# EAGLE board MainBoard_Simple (EAGLE 7.7.0)

Size 72.39 x 53.34 mm. Coordinates in mm from the lower left corner, seen from the top.
Outline: 0,53.34 0,0 72.39,0 72.39,22.86 62.1,22.86 62.1,53.34 0,53.34
Copper layers (1*16): Top 0.035mm / dielectric 1.5mm / Bottom 0.035mm
Design rules "default": minimum track width 10mil, minimum drill 24mil, track to track 8mil, track to pad 8mil, pad to pad 8mil, via to via 8mil, smd to smd 8mil, copper to edge 40mil, drill to drill 8mil, minimum pad ring 10mil, minimum via ring 8mil, stop-mask expansion 4mil, vias tented up to drill 0mil, thermal gap 10mil
Net classes: 1 med: width 0.254 mm, clearance 1.27 mm; 2 hv: width 0.254 mm, clearance 3.81 mm

## Footprints (pad centres in the part's own frame; a part is rotated, then mirrored left to right if it is on the bottom)
C1206 = smd 1.6 x 1.8: 1 -1.4,0; 2 1.4,0
C0603 = smd 1.1 x 1: 1 -0.85,0; 2 0.85,0
TAP5-60 = drill 0.813: + -2.54,0 | drill 0.813 octagon: - 2.54,0
SOD-123 = smd 0.9 x 0.95: A 1.575,0; C -1.575,0
DIODE-1N4001 = drill 1 pad 1.981: A -5.08,0; C 5.08,0
P1-13 = drill 1.321 pad 2.159 octagon: TP 0,0
UNO_R3_SHIELD_NOLABELS = drill 1.016 pad 1.88: 3.3V 50.8,26.67; 5V 50.8,29.21; A0 50.8,41.91; A1 50.8,44.45; A2 50.8,46.99; A3 50.8,49.53; A4 50.8,52.07; A5 50.8,54.61; AREF 2.54,15.24; D2 2.54,49.53; D3 2.54,46.99; D4 2.54,44.45; D5 2.54,41.91; D6 2.54,39.37; D7 2.54,36.83; D8 2.54,33.02; D9 2.54,30.48; D10 2.54,27.94; D11 2.54,25.4; D12 2.54,22.86; D13 2.54,20.32; GND@0 50.8,31.75; GND@1 50.8,34.29; GND@2 2.54,17.78; IOREF 50.8,21.59; NC 50.8,19.05; RES 50.8,24.13; RX 2.54,54.61; SCL 2.54,10.16; SDA 2.54,12.7; TX 2.54,52.07; VIN 50.8,36.83
SJ_2S-NO = smd 0.635 x 1.27: 1 -0.45,0; 2 0.45,0
1X04 = drill 1.016 long: 1 -3.81,0; 2 -1.27,0; 3 1.27,0; 4 3.81,0
SO-08 = smd 0.6 x 2.2: 1 -1.905,-2.6; 2 -0.635,-2.6; 3 0.635,-2.6; 4 1.905,-2.6; 5 1.905,2.6; 6 0.635,2.6; 7 -0.635,2.6; 8 -1.905,2.6
SOT23-3 = smd 0.8 x 0.9: 1 -0.95,-1; 2 0.95,-1; 3 0,1.1
R0603 = smd 1 x 1.1: 1 -0.85,0; 2 0.85,0
1206 = smd 1.6 x 1.8: 1 -1.4,0; 2 1.4,0
AXIAL-0.4 = drill 0.9 pad 1.88: P$1 -5.08,0; P$2 5.08,0
SOT23-6 = smd 0.55 x 1.2: 1 0.95,1.3; 2 0,1.3; 3 -0.95,1.3; 4 -0.95,-1.3; 5 0,-1.3; 6 0.95,-1.3
SOIC8 = smd 0.61 x 2.21: 1 -1.905,-2.616; 2 -0.635,-2.616; 3 0.635,-2.616; 4 1.905,-2.616; 5 1.905,2.616; 6 0.635,2.616; 7 -0.635,2.616; 8 -1.905,2.616
SO08 = smd 0.61 x 2.21: 1 -1.905,-2.616; 2 -0.635,-2.616; 3 0.635,-2.616; 4 1.905,-2.616; 5 1.905,2.616; 6 0.635,2.616; 7 -0.635,2.616; 8 -1.905,2.616
CTX = smd 1.74 x 3.8: P$1 0,0; P$2 2.54,0; P$3 5.08,0; P$4 7.62,0; P$5 10.16,0; P$6 10.16,24.85; P$7 0,24.85
W237-102 = drill 1.194 long: 1 -2.5,-1.27; 2 2.5,-1.27

## Placement (x,y rotation side)
C1  0.05uf  [C1206]  30.48,30.48 0 top
C2  500pf  [C1206]  67.31,14.6 270 top
C3  [C0603]  -4.19,-24.64 0 top  (outside the outline)
C4  [TAP5-60]  2.16,-32.26 0 top  (outside the outline)
C5  0.1uf  [C0603]  -4.19,-41.27 0 top  (outside the outline)
C6  10uf  [C0603]  -4.19,-44.7 0 top  (outside the outline)
C7  0.1uf  [C0603]  -4.19,-49.53 0 top  (outside the outline)
C8  10uf  [C0603]  -4.19,-54.36 0 top  (outside the outline)
C9  0.1uf  [C0603]  -4.19,-59.18 0 top  (outside the outline)
C10  10uf  [C0603]  -4.19,-64.01 0 top  (outside the outline)
C12  [TAP5-60]  2.16,-76.45 0 top  (outside the outline)
D1  [SOD-123]  29.21,19.69 270 top
D3  [DIODE-1N4001]  63.5,6.98 0 top
D4  [SOD-123]  28.57,34.29 90 top
D6  [SOD-123]  33.65,36.83 90 top
HV+  TPSQPAD1-13  [P1-13]  68.58,9.53 270 top
HV-  TPSQPAD1-13  [P1-13]  67.31,20.95 270 top
J1  ARDUINO_R3_SHIELDNOLABELS  [UNO_R3_SHIELD_NOLABELS]  62.23,0 90 top
JP1  [SJ_2S-NO]  32.38,18.41 0 top
JP2  [1X04]  4.45,-14.61 0 top  (outside the outline)
Q1  [SO-08]  31.11,43.82 180 top
Q2  [SO-08]  44.45,39.37 270 top
Q3  [SO-08]  30.48,13.33 0 top
Q4  MPSA42  [SOT23-3]  10.16,18.41 90 top
Q5  [SO-08]  44.45,45.72 270 top
Q6  MPSA42  [SOT23-3]  10.16,45.72 90 top
Q8  MPSA42  [SOT23-3]  10.16,30.48 90 top
R1  4.7k  [R0603]  13.34,46.99 180 top
R2  180r  [R0603]  32.38,21.59 90 top
R5  2.2k  [R0603]  11.18,42.93 180 top
R6  2.2k  [R0603]  14.22,42.93 180 top
R7  8.2k  [R0603]  14.22,40.89 0 top
R8  430k  [1206]  5.71,45.72 180 top
R9  4.7k  [R0603]  26.04,38.48 270 top
R10  4.7k  [R0603]  13.34,31.75 180 top
R14  2.2k  [R0603]  10.29,27.43 180 top
R15  2.2k  [R0603]  13.34,27.43 180 top
R16  8.2k  [R0603]  13.34,25.27 0 top
R18  430k  [1206]  5.71,30.48 180 top
R20  20k  [R0603]  60.32,17.78 270 top
R22  4.7k  [R0603]  26.67,25.4 90 top
R23  2.2k  [R0603]  10.16,15.87 180 top
R24  2.2k  [R0603]  13.34,15.87 180 top
R26  20m  [AXIAL-0.4]  64.14,15.24 270 top
R27  8.2k  [R0603]  13.34,13.97 0 top
R28  10k  [R0603]  24.13,21.59 0 top
R29  430k  [1206]  5.71,18.41 180 top
R30  4.7k  [R0603]  13.34,19.69 180 top
R31  1M  [1206]  26.04,34.29 270 top
R32  4.7k  [R0603]  29.21,25.4 90 top
R33  10k  [R0603]  24.13,19.05 180 top
R34  10k  [R0603]  24.13,16.51 0 top
R35  10k  [R0603]  24.13,13.97 180 top
U1  MCP4725  [SOT23-6]  17.78,14.6 90 top
U2  MCP4725  [SOT23-6]  17.53,45.34 180 top
U3  MCP4725  [SOT23-6]  19.05,23.49 180 top
U4  MAX31855K  [SOIC8]  10.16,7.62 270 top
U$2  ACS712  [SO08]  44.45,33.02 90 top
U$3  CTX  [CTX]  35.56,20.95 270 top
X1  [W237-102]  54.61,27.94 270 top
X5  [W237-102]  54.61,38.1 270 top
X6  [W237-102]  54.61,48.26 270 top
Y+1  TPSQPAD1-13  [P1-13]  3.81,8.89 0 top
Y+2  TPSQPAD1-13  [P1-13]  3.81,3.81 0 top

## Library data of the parts
C1 C2 = eagle-ltspice; SPICEMODEL: NONE; SPICEPREFIX: C
C3-C10 C12 R1 R2 R5-R7 R9 R10 R14-R16 R20 R22-R24 R27 R28 R30 R32-R35 = rcl
D1 D3 D4 D6 = SparkFun-DiscreteSemi
HV+ HV- Y+1 Y+2 = testpad
J1 = SparkFun-Boards
JP1 = SparkFun-Retired
JP2 = pinhead
Q1-Q3 Q5 = transistor-power
Q4 Q6 Q8 = SparkFun-DiscreteSemi; PROD_ID: TRANS-09116
R8 R18 R26 R29 R31 = SparkFun-Resistors
U1-U3 = SparkFun-AnalogIC; PROD_ID: IC-08886
U4 = SparkFun-AnalogIC
U$2 = SparkFun-AnalogIC; PROD_ID: IC-08964
U$3 = TheLibrary
X1 X5 X6 = con-wago-500; MPN: 237-102; OC_FARNELL: unknown; OC_NEWARK: 70K9898

## Nets
+5V: C5.1 C6.1 C7.1 C8.1 C9.1 C10.1 C12.+ J1.5V R5.2 R14.2 R22.1 R23.2 R32.1 U1.3 U2.3 U3.3 U$2.8
+12V: C3.1 C4.+ D6.C J1.VIN JP2.3 R2.2 X1.1 X5.1 X6.1
GND: C1.2 C2.1 C3.2 C4.- C5.2 C6.2 C7.2 C8.2 C9.2 C10.2 C12.- HV-.TP J1.GND@2 JP2.2 Q1.1 Q1.2 Q1.3 Q2.1 Q2.2 Q2.3 Q3.1 Q3.2 Q3.3 Q5.1 Q5.2 Q5.3 R1.1 R6.1 R9.1 R10.1 R15.1 R20.1 R24.1 R30.1 R33.1 R35.1 U1.2 U2.2 U3.2 U4.1 U$2.5 U$3.P$7 X1.2
N$1 [med]: Q6.3 R8.1
N$2: D4.A JP2.1
N$3: R7.2 U2.1
N$4: Q6.2 R1.2
N$5: D6.A JP2.4 Q1.5 Q1.6 Q1.7 Q1.8
N$8: Q6.1 R5.1 R6.2 R7.1
N$9: Q4.2 R30.2
N$10: J1.D3 Q1.4
N$11: Q8.2 R10.2
N$13: J1.SDA R22.2 U1.4 U2.4 U3.4
N$14: Q8.1 R14.1 R15.2 R16.1
N$16 [med]: Q8.3 R18.1
N$17: R16.2 U3.1
N$18: J1.D2 U2.6
N$19: J1.D4 U3.6
N$20: J1.A0 R9.2 R31.1
N$23: Q2.5 Q2.6 Q2.7 Q2.8 U$2.3 U$2.4
N$24: U$2.1 U$2.2 X5.2
N$25: J1.D5 Q2.4
N$26: D1.A JP1.1 Q3.5 Q3.6 Q3.7 Q3.8 U$3.P$3
N$27: JP1.2 U$3.P$2
N$28: D1.C R2.1 U$3.P$1
N$29 [hv]: D3.A U$3.P$6
N$30 [hv]: C2.2 D3.C HV+.TP R26.P$2
N$31: R28.1 R33.2 U4.5
N$33: Q4.1 R23.1 R24.2 R27.1
N$34: R27.2 U1.1
N$35: J1.SCL R32.2 U1.5 U2.5 U3.5
N$36: Q4.3 R29.1
N$37: R34.1 R35.2 U4.6
N$38: J1.D9 Q3.4
N$39: J1.D10 R28.2
N$40: J1.A2 R20.2 R26.P$1
N$41 [med]: Q5.5 Q5.6 Q5.7 Q5.8 X6.2
N$42: J1.D11 Q5.4
N$43: J1.A3 U$2.7
N$44: J1.D12 R34.2
N$45: J1.D7 U1.6
N$46: J1.D8 U4.7
N$47: U4.2 Y+1.TP
N$48: U4.3 Y+2.TP
N$49: J1.3.3V U4.4
VCCINT [med]: C1.1 D4.C R8.2 R18.2 R29.2 R31.2

## Tracks (layer width: path | path; a pad name or v marks a point on that pad's centre or on a via)
+5V  (16 unrouted)
+12V  (8 unrouted)
GND  (42 unrouted)
N$1  (1 unrouted)
N$2  (1 unrouted)
N$3  (1 unrouted)
N$4  (1 unrouted)
N$5  (5 unrouted)
N$8  (3 unrouted)
N$9  (1 unrouted)
N$10  (1 unrouted)
N$11  (1 unrouted)
N$13  (4 unrouted)
N$14  (3 unrouted)
N$16  (1 unrouted)
N$17  (1 unrouted)
N$18  (1 unrouted)
N$19  (1 unrouted)
N$20  (2 unrouted)
N$23  (5 unrouted)
N$24  (2 unrouted)
N$25  (1 unrouted)
N$26  (6 unrouted)
N$27  (1 unrouted)
N$28  (2 unrouted)
N$29  (1 unrouted)
N$30  (3 unrouted)
N$31  (2 unrouted)
N$33  (3 unrouted)
N$34  (1 unrouted)
N$35  (4 unrouted)
N$36  (1 unrouted)
N$37  (2 unrouted)
N$38  (1 unrouted)
N$39  (1 unrouted)
N$40  (2 unrouted)
N$41  (4 unrouted)
N$42  (1 unrouted)
N$43  (1 unrouted)
N$44  (1 unrouted)
N$45  (1 unrouted)
N$46  (1 unrouted)
N$47  (1 unrouted)
N$48  (1 unrouted)
N$49  (1 unrouted)
VCCINT  (5 unrouted)

## Text on the board
_tsilk: 4.7k | X- | 430k | Q5 | Q1 | -AUX+ | 430k | 4.7k | Q2 | 2.2k | 2.2k | 4.7k | X+ | 1M | 400V | 8.2k | HEATER | Y- | 4.7k | 430k | C1 | 180r | ACS712 | 430k | 4.7k | 0.05uf | 12V | DANGER | 2.2k | HIGH VOLTAGE | 2.2k | 4.7k | GND | Y+ | 4.7k | 10k | 180r | HV- | 430k | U3 | R2 | 8.2k | 10k | 20k | 2.2k | 10k | 2.2k | R34 | 20m | 500pf | C2 | 10k | FOCUS | 8.2k | R35 | HV+ | Q3 | T+ | Ion Printer | T- | Deflector Shield V1 | 3KV | DANGER HIGH VOLTAGE